# Altium PCB BF6底板.PcbDoc
Units mm, origin at the board's own origin, x right, y up, seen from the top; angles counter-clockwise.
Board outline 400 x 300 mm, 2 copper layers (Top Layer, Bottom Layer); 84 components, 64 nets, 657 pads, 0 vias.
Unrouted connection lines stored in the file: 176.
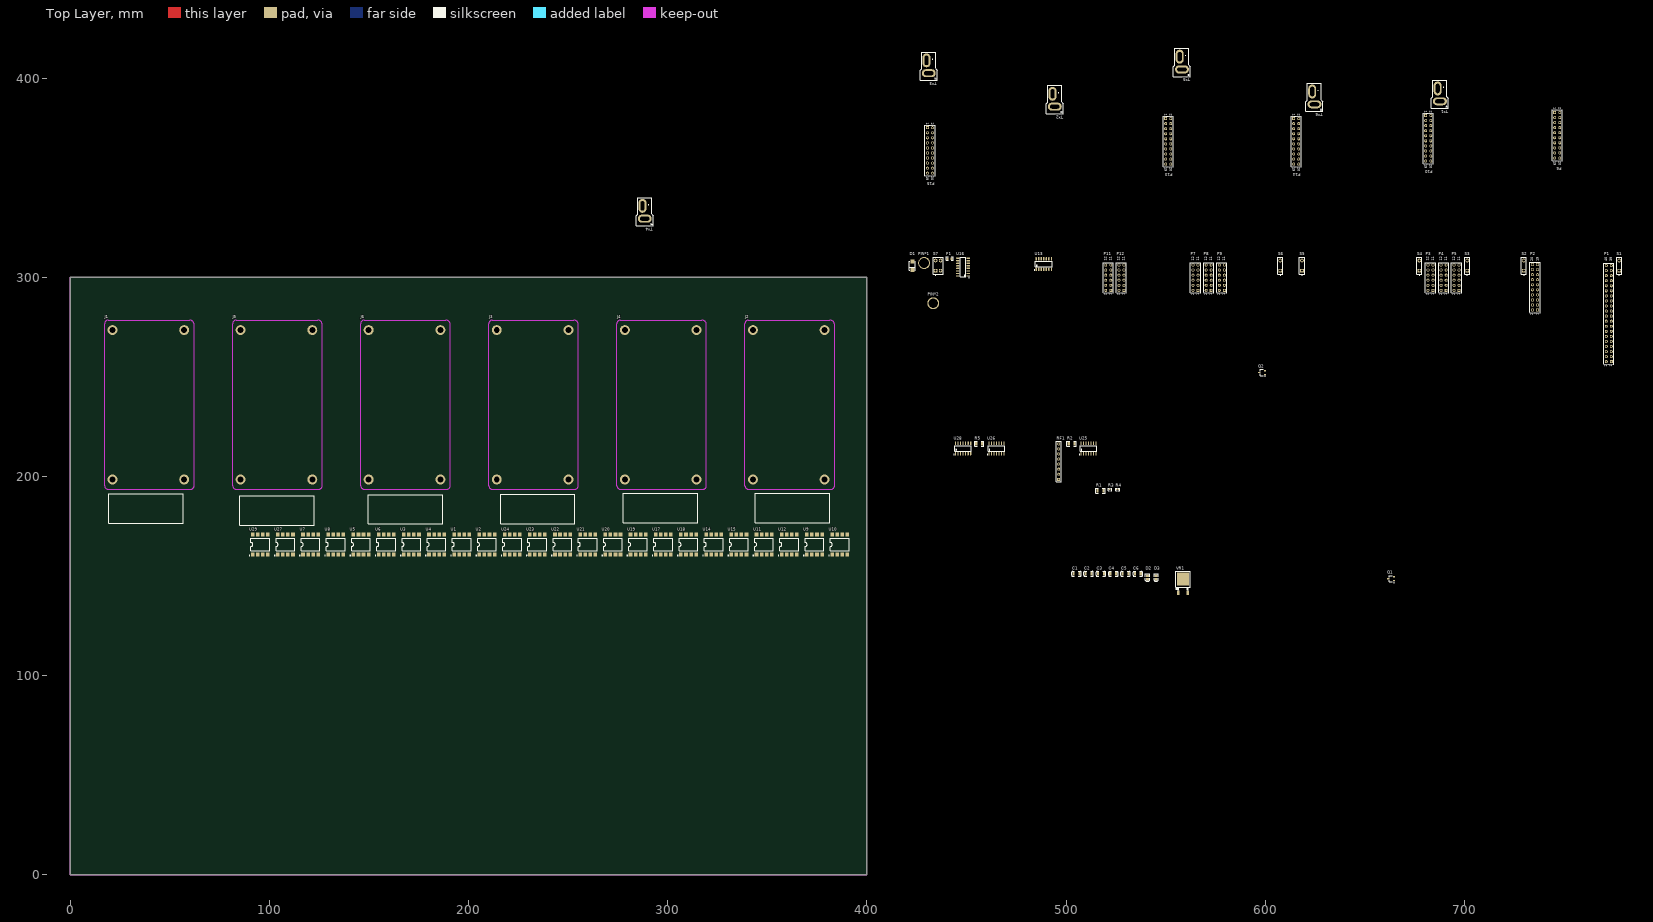
[diagram p0: Top Layer view]
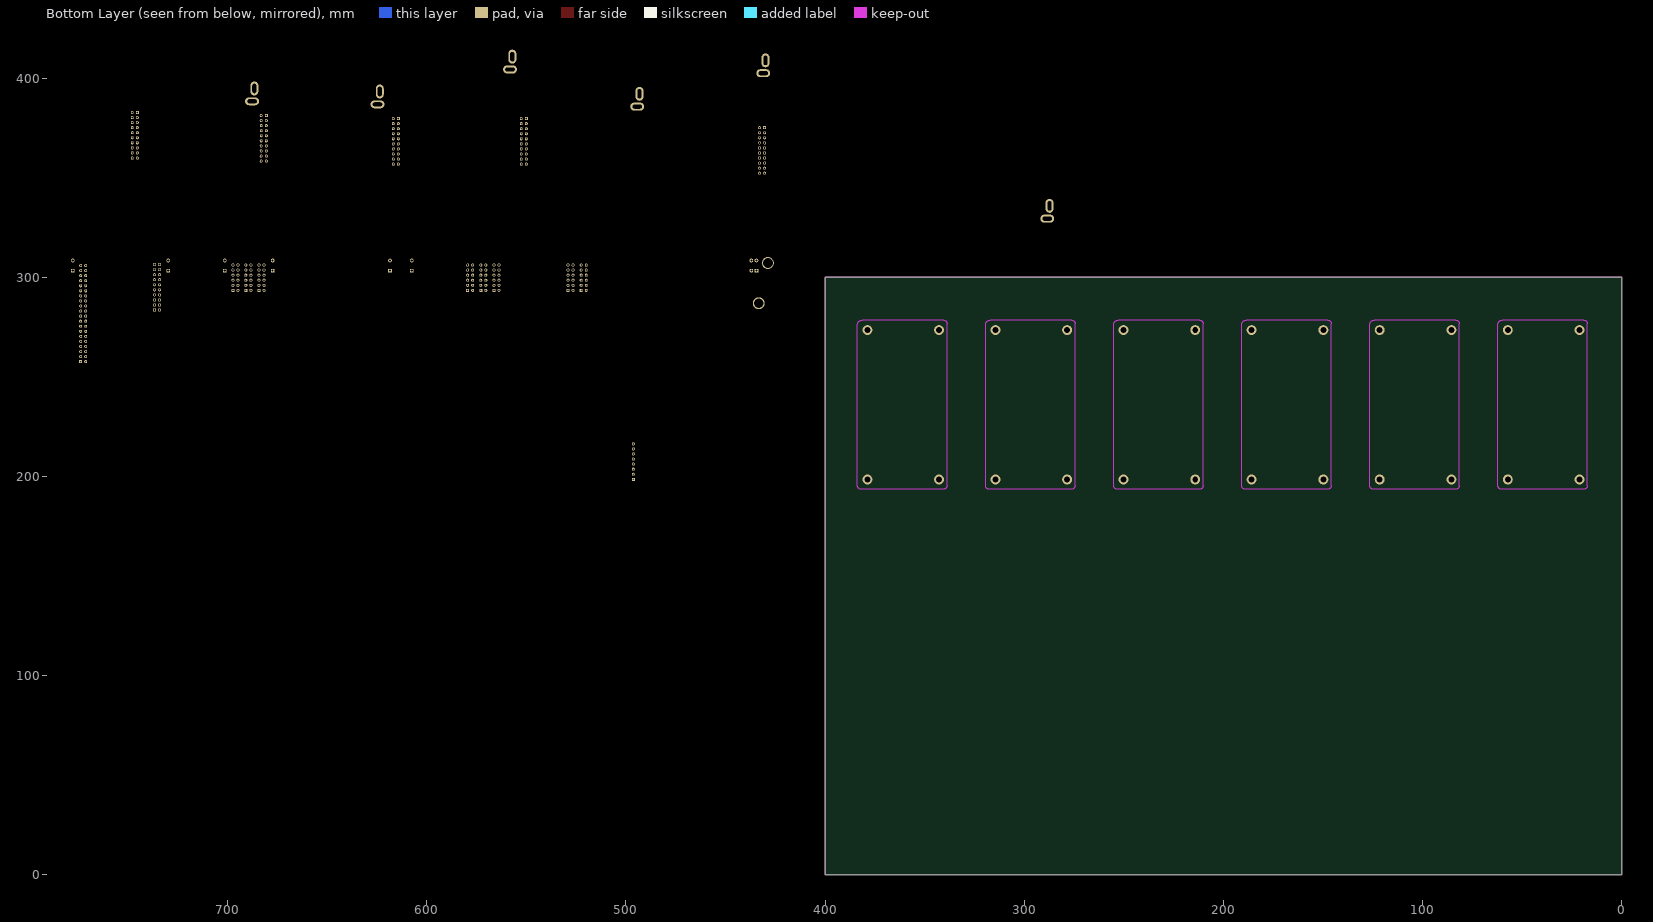
[diagram p1: Bottom Layer view, seen from below]

## Layer stack, top to bottom
Top Solder: solder mask 0.0102, Solder Resist, Dk 3.5
Top Layer: signal copper 0.0356
Dielectric 1: dielectric 0.32, FR-4, Dk 4.8
Bottom Layer: signal copper 0.0356
Bottom Solder: solder mask 0.0102, Solder Resist, Dk 3.5

## Board outline
0,0 0,300 400,300 400,0

## Design rules (kind name [scope] priority, off if disabled: settings)
Clearance [All] p1: gap=0.254 ignorepadtopadclearanceinfootprint=FALSE except(0: Arc-Hole Track-Hole SMDPad-Hole THPad-Hole Via-Hole Fill-Hole Poly-Hole Region-Hole Text-Hole)
PolygonConnect [All] p1: connectstyle=Relief reliefconductorwidth=0.254 reliefentries=4 polygonreliefangle="90 Angle" airgapwidth=0.254
RoutingVias [All] p1: holewidth=0.711 width=1.27 viastyle="Through Hole" minholewidth=0.711 minwidth=1.27 maxholewidth=0.711 maxwidth=1.27
SolderMaskExpansion [All] p1: expansion=0.102
Width [All] p1: maxlimit=0.254 minlimit=0.254 preferedwidth=0.254
30 further rules are at their usual default settings.

## Components (designator, comment, footprint, x,y, rotation, side; value= is the part's Value field where it differs from the comment)
C1 "10nF (103) 10% 50V" 1206_C 505.206,151.13 r0 top
C2 "10uF (106) 10% 50V" 1206_C 511.302,151.13 r0 top
C3 "4.7uF (475) 10% 50V" 1206_C 517.525,151.13 r0 top
C4 "10uF (106) 10% 50V" 1206_C 523.748,151.13 r0 top
C5 "10uF (106) 10% 50V" 1206_C 529.844,151.13 r0 top
C6 "10nF (103) 10% 50V" 1206_C 536.067,151.13 r0 top
D1 "M7" SMA(DO-214AC)_S1 422.783,305.816 r90 top
D2 "翠绿 0805" 0805_LED_S1 540.893,149.352 r90 top
D3 "白灯 0805" 0805_LED_S1 545.211,149.352 r90 top
F1 "10A" 0805(2012) 441.579,309.372 r0 top
J1 "Socket" PCBComponent_1 40.894,236.982 r90 top
J2 "Socket" PCBComponent_1 362.458,236.982 r90 top
J3 "Socket" PCBComponent_1 233.832,236.982 r90 top
J4 "Socket" PCBComponent_1 298.145,236.982 r90 top
J5 "Socket" PCBComponent_1 105.207,236.982 r90 top
J6 "Socket" PCBComponent_1 169.52,236.982 r90 top
P1 "Header 20X2" HDR2X20 773.811,257.683 r90 top
P2 "Header 10X2" HDR2X10 736.727,283.591 r90 top
P3 "Header 6X2" HDR2X6 684.276,293.497 r90 top
P4 "Header 6X2" HDR2X6 690.88,293.497 r90 top
P5 "Header 6X2" HDR2X6 697.357,293.497 r90 top
P6 "Header 10X2" HDR2X10 745.363,382.791 r270 top
P7 "Header 6X2" HDR2X6 566.293,293.497 r90 top
P8 "Header 6X2" HDR2X6 572.897,293.497 r90 top
P9 "Header 6X2" HDR2X6 579.501,293.497 r90 top
P10 "Header 10X2" HDR2X10 680.593,381.254 r270 top
P11 "Header 6X2" HDR2X6 522.478,293.497 r90 top
P12 "Header 6X2" HDR2X6 529.082,293.497 r90 top
P13 "Header 10X2" HDR2X10 550.037,379.73 r270 top
P14 "Header 10X2" HDR2X10 614.299,379.73 r270 top
P15 "Header 10X2" HDR2X10 430.403,375.158 r270 top
PIN*1 "PIN" PIN 428.752,307.213 r0 top
PIN*2 "PIN" PIN 433.324,287.02 r0 top
Q1 "AO3400A N道沟 X0YV1T SOT-23" SOT-23-3L 663.194,148.717 r0 top
Q2 "AO3400A N道沟 X0YV1T SOT-23" SOT-23-3L 598.424,252.222 r0 top
R1 "100Ω (1000) ±1%" 1206_R 517.271,192.913 r0 top
R2 "100Ω (1000) ±1%" 1206_R 502.793,216.408 r0 top
R3 "1KΩ (1001) ±1%" 0402_R 522.097,193.548 r0 top
R4 "1KΩ (1001) ±1%" 0402_R 525.907,193.548 r0 top
R5 "100Ω (1000) ±1%" 1206_R 456.438,216.408 r0 top
RF1 "Header 8" HDR1X8 496.316,198.628 r90 top
S1 "SW-SPST" SPST-2 777.748,305.943 r90 top
S2 "SW-SPST" SPST-2 729.869,305.943 r90 top
S3 "SW-SPST" SPST-2 701.421,305.943 r90 top
S4 "SW-SPST" SPST-2 677.418,305.943 r90 top
S5 "SW-SPST" SPST-2 618.49,305.943 r90 top
S6 "SW-SPST" SPST-2 607.568,305.943 r90 top
S7 "SW-DPST" DPST-4 435.737,305.943 r90 top
T*1 "T头" T插 687.324,393.586 r270 top
T*2 "T头" T插 493.938,390.906 r270 top
T*3 "T头" T插 430.657,407.67 r270 top
T*4 "T头" T插 288.036,334.645 r270 top
T*5 "T头" T插 557.784,409.575 r270 top
T*6 "T头" T插 624.332,392.049 r270 top
U1 "6N137S(TA)" SMD-8_6.3mm 196.579,165.862 r0 top
U2 "6N137S(TA)" SMD-8_6.3mm 209.23,165.862 r0 top
U3 "6N137S(TA)" SMD-8_6.3mm 171.279,165.862 r0 top
U4 "6N137S(TA)" SMD-8_6.3mm 183.929,165.862 r0 top
U5 "6N137S(TA)" SMD-8_6.3mm 145.978,165.862 r0 top
U6 "6N137S(TA)" SMD-8_6.3mm 158.629,165.862 r0 top
U7 "6N137S(TA)" SMD-8_6.3mm 120.678,165.862 r0 top
U8 "6N137S(TA)" SMD-8_6.3mm 133.328,165.862 r0 top
U9 "6N137S(TA)" SMD-8_6.3mm 373.684,165.862 r0 top
U10 "6N137S(TA)" SMD-8_6.3mm 386.334,165.862 r0 top
U11 "6N137S(TA)" SMD-8_6.3mm 348.383,165.862 r0 top
U12 "6N137S(TA)" SMD-8_6.3mm 361.033,165.862 r0 top
U13 "74HC04D" SOIC-14_150mil 488.823,306.705 r0 top
U14 "6N137S(TA)" SMD-8_6.3mm 323.082,165.862 r0 top
U15 "6N137S(TA)" SMD-8_6.3mm 335.733,165.862 r0 top
U16 "74HC138D" SOIC-16_150mil 448.31,305.181 r90 top
U17 "6N137S(TA)" SMD-8_6.3mm 297.782,165.862 r0 top
U18 "6N137S(TA)" SMD-8_6.3mm 310.432,165.862 r0 top
U19 "6N137S(TA)" SMD-8_6.3mm 285.132,165.862 r0 top
U20 "6N137S(TA)" SMD-8_6.3mm 272.481,165.862 r0 top
U21 "6N137S(TA)" SMD-8_6.3mm 259.831,165.862 r0 top
U22 "6N137S(TA)" SMD-8_6.3mm 247.181,165.862 r0 top
U23 "6N137S(TA)" SMD-8_6.3mm 234.53,165.862 r0 top
U24 "6N137S(TA)" SMD-8_6.3mm 221.88,165.862 r0 top
U25 "74HC08D" SOIC-14_150mil 511.302,214.122 r0 top
U26 "74HC08D" SOIC-14_150mil 465.074,214.122 r0 top
U27 "6N137S(TA)" SMD-8_6.3mm 108.027,165.862 r0 top
U28 "74HC08D" SOIC-14_150mil 448.31,214.122 r0 top
U29 "6N137S(TA)" SMD-8_6.3mm 95.377,165.862 r0 top
VR1 "L78M05ABDT-TR" TO-252-2-180 558.673,141.605 r90 top

## Footprints (in the part's own frame and the unit in brackets; to place one, negate y for a bottom-side part, rotate by r counter-clockwise, add the part's x,y. Pads: shape width x height; smd on the part's side, far side on the other; paste and mask are expansions set on the pad)
0402_R [mm]
  rect 0.6x0.65 smd mask+0.051: 1(-0.425,0) 2(0.425,0)
  silkscreen extent -0.97,-0.58 0.97,0.58, body extent -0.57,-0.27 0.58,0.28, height 0.41
0805(2012) [mil]
  rect 40x50 smd: 1(-40,0) 2(40,0)
  silkscreen extent -70,-35 70,35
0805_LED_S1 [mm]
  rect 1.16x1.47 smd: A(0.89,0) K(-0.89,0)
  silkscreen extent -2.24,-1.04 1.77,1.03, body extent -1.01,-0.62 1.01,0.62, height 1.1
1206_C [mm]
  rect 1.13x1.8 smd: 1(-1.49,0) 2(1.49,0)
  silkscreen extent -2.36,-1.2 2.35,1.2, body extent -1.6,-0.81 1.6,0.79, height 1
1206_R [mm]
  rect 1.13x1.8 smd: 1(-1.49,0) 2(1.49,0)
  silkscreen extent -2.36,-1.2 2.35,1.2, body extent -1.7,-0.86 1.65,0.87, height 0.85
DPST-4 [mm] "Switch; 4 Leads"
  rect 1.85x1.85 hole 1.1: 1(-2.54,1.27)
  round 1.85 hole 1.1: 2(-2.54,-1.27) 3(2.54,-1.27) 4(2.54,1.27)
  silkscreen extent -4.88,-2.54 4.28,2.54
HDR1X8 [mm] "Connector; Header; 8 Position"
  rect 1.5x1.5 hole 0.9: 1(0,0)
  round 1.5 hole 0.9: 2(2.54,0) 3(5.08,0) 4(7.62,0) 5(10.16,0) 6(12.7,0) 7(15.24,0) 8(17.78,0)
  silkscreen extent -1.27,-1.27 19.05,1.27, body extent -1.27,-1.27 19.05,1.27, height 7.58
HDR2X6 [mm] "Connector; Header; 6x2 Position"
  rect 1.5x1.5 hole 0.9: 1(0,0)
  round 1.5 hole 0.9: 2(0,2.54) 3(2.54,0) 4(2.54,2.54) 5(5.08,0) 6(5.08,2.54) 7(7.62,0) 8(7.62,2.54) 9(10.16,0) 10(10.16,2.54) 11(12.7,0) 12(12.7,2.54)
  silkscreen extent -1.27,-1.27 13.97,3.81, body extent -1.27,-1.27 13.97,3.81, height 7.58
HDR2X10 [mm] "Connector; Header; 10x2 Position"
  rect 1.5x1.5 hole 0.9: 1(0,0)
  round 1.5 hole 0.9: 2(0,2.54) 3(2.54,0) 4(2.54,2.54) 5(5.08,0) 6(5.08,2.54) 7(7.62,0) 8(7.62,2.54) 9(10.16,0) 10(10.16,2.54) 11(12.7,0) 12(12.7,2.54) 13(15.24,0) 14(15.24,2.54) 15(17.78,0) 16(17.78,2.54) 17(20.32,0) 18(20.32,2.54) 19(22.86,0) 20(22.86,2.54)
  silkscreen extent -1.27,-1.27 24.13,3.81, body extent -1.27,-1.27 24.13,3.81, height 7.58
HDR2X20 [mm] "Connector; Header; 20x2 Position"
  rect 1.5x1.5 hole 0.9: 1(0,0)
  round 1.5 hole 0.9: 2(0,2.54) 3(2.54,0) 4(2.54,2.54) 5(5.08,0) 6(5.08,2.54) 7(7.62,0) 8(7.62,2.54) 9(10.16,0) 10(10.16,2.54) 11(12.7,0) 12(12.7,2.54) 13(15.24,0) 14(15.24,2.54) 15(17.78,0) 16(17.78,2.54) 17(20.32,0) 18(20.32,2.54) 19(22.86,0) 20(22.86,2.54) 21(25.4,0) 22(25.4,2.54) 23(27.94,0) 24(27.94,2.54) 25(30.48,0) 26(30.48,2.54) 27(33.02,0) 28(33.02,2.54) 29(35.56,0) 30(35.56,2.54) 31(38.1,0) 32(38.1,2.54) 33(40.64,0) 34(40.64,2.54) 35(43.18,0) 36(43.18,2.54) 37(45.72,0) 38(45.72,2.54) 39(48.26,0) 40(48.26,2.54)
  silkscreen extent -1.27,-1.27 49.53,3.81, body extent -1.27,-1.27 49.53,3.81, height 7.58
PCBComponent_1 [mm]
  round 5 hole 3: 0(-38.454,-16.312) 0(-38.454,19.688) 0(36.546,-16.312) 0(36.546,19.688)
  oval 4x7 on Mech15: 1(-2.34,14.895)
  round 4 on Mech15: 1(35.841,-5.906) 1(35.841,-0.826) 1(35.841,4.254) 1(35.841,9.334)
  oval 7x4 on Mech15: 2(4.104,16.038)
  Top Layer pour cut-out: -6.196,16.962
  Keep-Out Layer lines w0.254: -41.507,23.688 ccw(c-41.507,21.741) -43.454,21.741 -43.454,-19.407 ccw(c-41.549,-19.407) -41.549,-21.312 39.223,-21.312 ccw(c39.223,-18.989) 41.546,-18.989 41.546,21.925 ccw(c39.783,21.925) 39.783,23.688 -41.507,23.688
  body extent -40.81,-19.61 22.79,21, height 7.58
PIN [mm]
  round 6 hole 5: 1(0,0)
SMA(DO-214AC)_S1 [mm]
  rect 2x2 smd: 1(2.1,0) 2(-2.1,0)
  silkscreen extent -2.35,-1.5 2.35,1.5
SMD-8_6.3mm [mm]
  rect 1.8x2 smd: 1(-3.81,-4.95) 2(-1.27,-4.95) 3(1.27,-4.95) 4(3.81,-4.95) 5(3.81,4.95) 6(1.27,4.95) 7(-1.27,4.95) 8(-3.81,4.95)
  silkscreen extent -5.6,-5.7 4.7,3.1
SOIC-14_150mil [mm]
  oval 0.6x1.8 smd: 1(-3.81,-2.6) 2(-2.54,-2.6) 3(-1.27,-2.6) 4(0,-2.6) 5(1.27,-2.6) 6(2.54,-2.6) 7(3.81,-2.6) 8(3.81,2.6) 9(2.54,2.6) 10(1.27,2.6) 11(0,2.6) 12(-1.27,2.6) 13(-2.54,2.6) 14(-3.81,2.6)
  silkscreen extent -4.75,-3.15 4.2,1.4
SOIC-16_150mil [mm]
  oval 0.6x1.8 smd: 1(-4.445,-2.6) 2(-3.175,-2.6) 3(-1.905,-2.6) 4(-0.635,-2.6) 5(0.635,-2.6) 6(1.905,-2.6) 7(3.175,-2.6) 8(4.445,-2.6) 9(4.445,2.6) 10(3.175,2.6) 11(1.905,2.6) 12(0.635,2.6) 13(-0.635,2.6) 14(-1.905,2.6) 15(-3.175,2.6) 16(-4.445,2.6)
  silkscreen extent -5.4,-3.05 4.97,1.4
SOT-23-3L [mm] "http://www.aosmd.com/res/packaging_information/SOT-23-3L.pdf"
  rect 1.15x0.65 smd: 1(1.475,-0.95) 2(1.475,0.95) 3(-1.475,0)
  silkscreen extent -0.9,-1.95 1.6,1.55, body extent -0.9,-1.55 0.9,1.55, height 1.25
SPST-2 [mm] "Switch; 2 Leads"
  rect 1.85x1.85 hole 1.1: 1(-2.54,0)
  round 1.85 hole 1.1: 2(2.54,0)
  silkscreen extent -4.89,-1.27 4.28,1.27
TO-252-2-180 [mm] "180度编带包装"
  rect 2.2x1.2 smd: 1(0,2.361) 3(0.004,-2.361)
  rect 6.5x6 smd: 2(7,0)
  silkscreen extent 1.5,-3.57 10.75,3.57, body extent -0.2,-3.27 9.74,3.27, height 2.44
T插 [mm]
  oval 4x7 hole 1.9 slot 4.6 at 90 deg: 1(5.161,0.416)
  oval 7x4 hole 1.9 slot 4.6 at 0 deg: 2(-1.283,-0.727)
  silkscreen extent -5.46,-3.9 8.75,4.61

## Part data
C1 C6: library part "1206 10nF (103) 10% 50V", "贴片电容", Package=1206, SuppliersPartNumber=C1846, ComponentLink1Description=供应商, ComponentLink1URL=http://www.szlcsc.com/product/details_2198.html, Supplier=LC
C2 C4 C5: library part "1206 10uF (106) 10% 50V", "贴片电容", Package=1206, SuppliersPartNumber=C13585, ComponentLink1Description=供应商, ComponentLink1URL=http://www.szlcsc.com/product/details_14236.html, Supplier=LC
C3: library part "1206 4.7uF (475) 10% 50V", "贴片电容", Package=1206, SuppliersPartNumber=C29823, ComponentLink1Description=供应商, ComponentLink1URL=http://www.szlcsc.com/product/details_30577.html, Supplier=LC
D1: library part "SMA(DO-214AC) M7", "二极管", Package=SMA(DO-214AC), SuppliersPartNumber=C95872, ComponentLink1Description=供应商, ComponentLink1URL=http://www.szlcsc.com/product/details_2841.html, Supplier=LC, 备注="1N4007 4007 编号C2464 已经停售, 使用新"
D2: library part "0805 翠绿", "发光二极管", Package=0805, SuppliersPartNumber=C2297, ComponentLink1Description=供应商, ComponentLink1URL=http://www.szlcsc.com/product/details_2670.html, Supplier=LC
D3: library part "0805 白灯", "发光二极管", Package=0805, SuppliersPartNumber=C34499, ComponentLink1Description=供应商, ComponentLink1URL=http://www.szlcsc.com/product/details_35468.html, Supplier=LC
F1: library part "Fuse 1", "Fuse", LatestRevisionDate=17-Jul-2002, LatestRevisionNote="Re-released for DXP Platform.", PackageReference=PIN-W2/E2.8, Published=8-Jun-2000, Publisher="Altium Limited"
P1: "Header, 20-Pin, Dual row", LatestRevisionDate=17-Jul-2002, LatestRevisionNote="Re-released for DXP Platform.", Publisher="Altium Limited"
P2 P6 P10 P13 P14 P15: "Header, 10-Pin, Dual row", LatestRevisionDate=17-Jul-2002, LatestRevisionNote="Re-released for DXP Platform.", Publisher="Altium Limited"
P3 P4 P5 P7 P8 P9 P11 P12: "Header, 6-Pin, Dual row", LatestRevisionDate=17-Jul-2002, LatestRevisionNote="Re-released for DXP Platform.", Publisher="Altium Limited"
Q1 Q2: "MOS(场效应管)", Package=SOT-23, SuppliersPartNumber=C20917, ComponentLink1Description=供应商, ComponentLink1URL=http://www.szlcsc.com/product/details_21629.html, Supplier=LC
R1 R2 R5: library part "1206 100Ω (1000) 1%", "贴片电阻", Package=1206, SuppliersPartNumber=C17901, ComponentLink1Description=供应商, ComponentLink1URL=http://www.szlcsc.com/product/details_18589.html, Supplier=LC
R3 R4: library part "0402 1KΩ (1001) 1%", "贴片电阻", Package=0402, SuppliersPartNumber=C11702, ComponentLink1Description=供应商, ComponentLink1URL=http://www.szlcsc.com/product/details_12256.html, Supplier=LC
RF1: "Header, 8-Pin", LatestRevisionDate=17-Jul-2002, LatestRevisionNote="Re-released for DXP Platform.", Publisher="Altium Limited"
S1 S2 S3 S4 S5 S6: "Single-Pole, Single-Throw Switch", LatestRevisionDate=17-Jul-2002, LatestRevisionNote="Re-released for DXP Platform.", PackageDescription="Switch; 2 Leads", PackageReference=SPST-2, Published=24-Mar-1999, Publisher="Altium Limited"
S7: "Double-Pole, Single-Throw Switch", LatestRevisionDate=17-Jul-2002, LatestRevisionNote="Re-released for DXP Platform.", PackageDescription="Switch; 4 Leads", PackageReference=DPST-4, Published=24-Mar-1999, Publisher="Altium Limited"
T*1 T*2 T*3 T*4 T*5 T*6: library part Tͷ
U1 U2 U3 U4 U5 U6 U7 U8 U9 U10 U11 U12 U14 U15 U17 U18 U19 U20 U21 U22 U23 U24 U27 U29: library part 6N137S(TA)_[C16496], "贴片光耦", Package=SMD-8_6.3mm, SuppliersPartNumber=C16496, ComponentLink1Description=供应商, ComponentLink1URL=http://www.szlcsc.com/product/details_17178.html, Supplier=LC
U13: library part 74HC04D_[C5590], "74系列逻辑芯片", Package=SOIC-14_150mil, SuppliersPartNumber=C5590, ComponentLink1Description=供应商, ComponentLink1URL=http://www.szlcsc.com/product/details_6041.html, Supplier=LC
U16: library part 74HC138D_[C5602], "74系列逻辑芯片", Package=SOIC-16_150mil, SuppliersPartNumber=C5602, ComponentLink1Description=供应商, ComponentLink1URL=http://www.szlcsc.com/product/details_6053.html, Supplier=LC
U25 U26 U28: library part 74HC08D_[C5593], "74系列逻辑芯片", Package=SOIC-14_150mil, SuppliersPartNumber=C5593, ComponentLink1Description=供应商, ComponentLink1URL=http://www.szlcsc.com/product/details_6044.html, Supplier=LC
VR1: library part "TO-252-2 L78M05ABDT-TR", "低压差线性稳压(LDO)", Package=TO-252-2, SuppliersPartNumber=C58069, ComponentLink1Description=供应商, ComponentLink1URL=http://www.szlcsc.com/product/details_59107.html, Supplier=LC
J1 J2 J3 J4 J5 J6: LatestRevisionDate=17-Jul-2002, LatestRevisionNote="Re-released for DXP Platform.", Publisher="Altium Limited"

## Nets (pads, with @x,y where several pads share a name; then routed paths per layer and width w, separated by ;. In a path a pad name is that pad's centre, name@x,y a point inside that pad or via, vN(x,y) a via of type N, cw(c..) or ccw(c..) an arc to the next point about the centre after c; other vN are vias at no path point)
+5: C3.2 C4.2 C5.2 C6.2 R3.1 R4.1 U16.6 U16.16 VR1.3
DIR0: P2.8 U2.6
DIR1: P6.8 U4.6
DIR2: P10.8 U6.6
DIR3: P13.8 U8.6
DIR4: P14.8 U10.6
DIR5: P15.8 U12.6
EGND: C1.1 C2.1 C3.1 C4.1 C5.1 C6.1 P2.1 P2.2 P2.5 P2.6 P2.9 P2.10 P2.15 P2.16 P2.19 P2.20 P6.1 P6.2 P6.5 P6.6 P6.9 P6.10 P6.15 P6.16 P6.19 P6.20 P10.1 P10.2 P10.5 P10.6 P10.9 P10.10 P10.15 P10.16 P10.19 P10.20 P13.1 P13.2 P13.5 P13.6 P13.9 P13.10 P13.15 P13.16 P13.19 P13.20 P14.1 P14.2 P14.5 P14.6 P14.9 P14.10 P14.15 P14.16 P14.19 P14.20 P15.1 P15.2 P15.5 P15.6 P15.9 P15.10 P15.15 P15.16 P15.19 P15.20 PIN*2.1 T*1.2 T*2.2 T*3.2 T*4.2 T*5.2 T*6.2 U16.4 U16.5 U16.8 VR1.2
FAULTn: U26.3
FAULTn0: P2.17 U25.1
FAULTn1: P6.17 U25.2
FAULTn2: P10.17 U25.4
FAULTn3: P13.17 U25.5
FAULTn4: P14.17 U25.9
FAULTn5: P15.17 U25.10
HC38A: U16.1 U20.6
HC38B: U16.2 U22.6
HC38C: U16.3 U24.6
NetD2_A: D2.A R3.2
NetD2_K: D2.K U16.7
NetD3_A: D3.A R4.2
NetD3_K: D3.K U16.9
NetR1_1: R1.1 U19.2
NetR2_1: R2.1 U21.2
NetR5_1: R5.1 U23.2
NetU13_1: U13.1 U16.15
NetU13_3: U13.3 U16.14
NetU13_5: U13.5 U16.13
NetU13_9: U13.9 U16.12
NetU13_11: U13.11 U16.11
NetU13_13: U13.13 U16.10
NetU25_3: U25.3 U25.12
NetU25_6: U25.6 U25.13
NetU25_8: U25.8 U26.2
NetU25_11: U25.11 U26.1
NetU26_6: U26.6 U26.13
NetU26_11: U26.11 U28.4
NetU26_12: U26.12 U28.3
NetU28_5: U28.5 U28.8
RESET: P2.4 P6.4 P10.4 P13.4 P14.4 P15.4 U15.6
SCLK: P2.11 P6.11 P10.11 P13.11 P14.11 P15.11 U17.6
SCS0: U13.2
SCS1: P2.13 P6.13 U13.4
SCS2: P10.13 U13.6
SCS3: P13.13 U13.8
SCS4: P14.13 U13.10
SCS5: P15.13 U13.12
SDATI: P2.12 P6.12 P10.12 P13.12 P14.12 P15.12 U18.6
SDATO: P2.14 P6.14 P10.14 P13.14 P14.14 P15.14
SLEEPn: P2.3 P6.3 P10.3 P13.3 P14.3 P15.3 U14.6
STALLn: U28.6
STALLn0: P2.18 U28.1
STALLn1: P6.18 U28.2
STALLn2: P10.18 U26.4
STALLn3: P13.18 U26.5
STALLn4: P14.18 U28.9
STALLn5: P15.18 U28.10
STEP0: P2.7 U1.6
STEP1: P6.7 U3.6
STEP2: P10.7 U5.6
STEP3: P13.7 U7.6
STEP4: P14.7 U9.6
STEP5: P15.7 U11.6
VCC: C1.2 C2.2 PIN*1.1 T*1.1 T*2.1 T*3.1 T*4.1 T*5.1 T*6.1 VR1.1
pads on no net: D1.1 D1.2 F1.1 F1.2 J1.0 J1.1 J1.2 J2.0 J2.1 J2.2 J3.0 J3.1 J3.2 J4.0 J4.1 J4.2 J5.0 J5.1 J5.2 J6.0 J6.1 J6.2 P1.1 P1.2 P1.3 P1.4 P1.5 P1.6 P1.7 P1.8 P1.9 P1.10 P1.11 P1.12 P1.13 P1.14 P1.15 P1.16 P1.17 P1.18 P1.19 P1.20 P1.21 P1.22 P1.23 P1.24 P1.25 P1.26 P1.27 P1.28 P1.29 P1.30 P1.31 P1.32 P1.33 P1.34 P1.35 P1.36 P1.37 P1.38 P1.39 P1.40 P3.1 P3.2 P3.3 P3.4 P3.5 P3.6 P3.7 P3.8 P3.9 P3.10 P3.11 P3.12 P4.1 P4.2 P4.3 P4.4 P4.5 P4.6 P4.7 P4.8 P4.9 P4.10 P4.11 P4.12 P5.1 P5.2 P5.3 P5.4 P5.5 P5.6 P5.7 P5.8 P5.9 P5.10 P5.11 P5.12 P7.1 P7.2 P7.3 P7.4 P7.5 P7.6 P7.7 P7.8 P7.9 P7.10 P7.11 P7.12 P8.1 P8.2 P8.3 P8.4 P8.5 P8.6 P8.7 P8.8 P8.9 P8.10 P8.11 P8.12 P9.1 P9.2 P9.3 P9.4 P9.5 P9.6 P9.7 P9.8 P9.9 P9.10 P9.11 P9.12 P11.1 P11.2 P11.3 P11.4 P11.5 P11.6 P11.7 P11.8 P11.9 P11.10 P11.11 P11.12 P12.1 P12.2 P12.3 P12.4 P12.5 P12.6 P12.7 P12.8 P12.9 P12.10 P12.11 P12.12 Q1.1 Q1.2 Q1.3 Q2.1 Q2.2 Q2.3 R1.2 R2.2 R5.2 RF1.1 RF1.2 RF1.3 RF1.4 RF1.5 RF1.6 RF1.7 RF1.8 S1.1 S1.2 S2.1 S2.2 S3.1 S3.2 S4.1 S4.2 S5.1 S5.2 S6.1 S6.2 S7.1 S7.2 S7.3 S7.4 U1.1 U1.2 U1.3 U1.4 U1.5 U1.7 U1.8 U2.1 U2.2 U2.3 U2.4 U2.5 U2.7 U2.8 U3.1 U3.2 U3.3 U3.4 U3.5 U3.7 U3.8 U4.1 U4.2 U4.3 U4.4 U4.5 U4.7 U4.8 U5.1 U5.2 U5.3 U5.4 U5.5 U5.7 U5.8 U6.1 U6.2 U6.3 U6.4 U6.5 U6.7 U6.8 U7.1 U7.2 U7.3 U7.4 U7.5 U7.7 U7.8 U8.1 U8.2 U8.3 U8.4 U8.5 U8.7 U8.8 U9.1 U9.2 U9.3 U9.4 U9.5 U9.7 U9.8 U10.1 U10.2 U10.3 U10.4 U10.5 U10.7 U10.8 U11.1 U11.2 U11.3 U11.4 U11.5 U11.7 U11.8 U12.1 U12.2 U12.3 U12.4 U12.5 U12.7 U12.8 U13.7 U13.14 U14.1 U14.2 U14.3 U14.4 U14.5 U14.7 U14.8 U15.1 U15.2 U15.3 U15.4 U15.5 U15.7 U15.8 U17.1 U17.2 U17.3 U17.4 U17.5 U17.7 U17.8 U18.1 U18.2 U18.3 U18.4 U18.5 U18.7 U18.8 U19.1 U19.3 U19.4 U19.5 U19.6 U19.7 U19.8 U20.1 U20.2 U20.3 U20.4 U20.5 U20.7 U20.8 U21.1 U21.3 U21.4 U21.5 U21.6 U21.7 U21.8 U22.1 U22.2 U22.3 U22.4 U22.5 U22.7 U22.8 U23.1 U23.3 U23.4 U23.5 U23.6 U23.7 U23.8 U24.1 U24.2 U24.3 U24.4 U24.5 U24.7 U24.8 U25.7 U25.14 U26.7 U26.8 U26.9 U26.10 U26.14 U27.1 U27.2 U27.3 U27.4 U27.5 U27.6 U27.7 U27.8 U28.7 U28.11 U28.12 U28.13 U28.14 U29.1 U29.2 U29.3 U29.4 U29.5 U29.6 U29.7 U29.8

## Keep-outs
Keep-Out Layer:
  the board outline again, w0.254

## Silkscreen, mask and mechanical layers (free items; w line width, h text height)
Top Overlay:
  lines w0.254: 19.304,176.657 56.642,176.657 56.642,191.262 19.304,191.262 19.304,176.657 ; 85.09,175.641 85.09,190.246 122.428,190.246 122.428,175.641 85.09,175.641 ; 149.733,176.276 149.733,190.881 187.071,190.881 187.071,176.276 149.733,176.276 ; 216.027,176.403 216.027,191.008 253.365,191.008 253.365,176.403 216.027,176.403 ; 277.622,176.911 277.622,191.516 314.96,191.516 314.96,176.911 277.622,176.911 ; 343.916,176.911 343.916,191.516 381.254,191.516 381.254,176.911 343.916,176.911

## Text inside footprints (layer, text, board x,y; h text height)
P1: Top Overlay "1" at 774.319,255.143 h1.27 r90; Top Overlay "2" at 771.779,255.143 h1.27 r90; Top Overlay "40" at 771.779,307.975 h1.27 r90; Top Overlay "39" at 774.319,307.975 h1.27 r90
P2: Top Overlay "20" at 734.695,307.975 h1.27 r90; Top Overlay "19" at 737.235,307.975 h1.27 r90; Top Overlay "1" at 737.235,281.051 h1.27 r90; Top Overlay "2" at 734.695,281.051 h1.27 r90
P3: Top Overlay "2" at 682.244,290.957 h1.27 r90; Top Overlay "1" at 684.784,290.957 h1.27 r90; Top Overlay "1" at 684.784,308.229 h1.27 r90; Top Overlay "1" at 684.784,309.245 h1.27 r90; Top Overlay "12" at 682.244,308.229 h1.27 r90
P4: Top Overlay "2" at 688.848,290.957 h1.27 r90; Top Overlay "1" at 691.388,290.957 h1.27 r90; Top Overlay "1" at 691.388,308.229 h1.27 r90; Top Overlay "1" at 691.388,309.245 h1.27 r90; Top Overlay "12" at 688.848,308.229 h1.27 r90
P5: Top Overlay "2" at 695.325,290.957 h1.27 r90; Top Overlay "1" at 697.865,290.957 h1.27 r90; Top Overlay "1" at 697.865,308.229 h1.27 r90; Top Overlay "1" at 697.865,309.245 h1.27 r90; Top Overlay "12" at 695.325,308.229 h1.27 r90
P6: Top Overlay "20" at 747.395,358.407 h1.27 r270; Top Overlay "19" at 744.855,358.407 h1.27 r270; Top Overlay "1" at 744.855,385.331 h1.27 r270; Top Overlay "2" at 747.395,385.331 h1.27 r270
P7: Top Overlay "2" at 564.261,290.957 h1.27 r90; Top Overlay "1" at 566.801,290.957 h1.27 r90; Top Overlay "1" at 566.801,308.229 h1.27 r90; Top Overlay "1" at 566.801,309.245 h1.27 r90; Top Overlay "12" at 564.261,308.229 h1.27 r90
P8: Top Overlay "2" at 570.865,290.957 h1.27 r90; Top Overlay "1" at 573.405,290.957 h1.27 r90; Top Overlay "1" at 573.405,308.229 h1.27 r90; Top Overlay "1" at 573.405,309.245 h1.27 r90; Top Overlay "12" at 570.865,308.229 h1.27 r90
P9: Top Overlay "2" at 577.469,290.957 h1.27 r90; Top Overlay "1" at 580.009,290.957 h1.27 r90; Top Overlay "1" at 580.009,308.229 h1.27 r90; Top Overlay "1" at 580.009,309.245 h1.27 r90; Top Overlay "12" at 577.469,308.229 h1.27 r90
P10: Top Overlay "20" at 682.625,356.87 h1.27 r270; Top Overlay "19" at 680.085,356.87 h1.27 r270; Top Overlay "1" at 680.085,383.794 h1.27 r270; Top Overlay "2" at 682.625,383.794 h1.27 r270
P11: Top Overlay "2" at 520.446,290.957 h1.27 r90; Top Overlay "1" at 522.986,290.957 h1.27 r90; Top Overlay "1" at 522.986,308.229 h1.27 r90; Top Overlay "1" at 522.986,309.245 h1.27 r90; Top Overlay "12" at 520.446,308.229 h1.27 r90
P12: Top Overlay "2" at 527.05,290.957 h1.27 r90; Top Overlay "1" at 529.59,290.957 h1.27 r90; Top Overlay "1" at 529.59,308.229 h1.27 r90; Top Overlay "1" at 529.59,309.245 h1.27 r90; Top Overlay "12" at 527.05,308.229 h1.27 r90
P13: Top Overlay "20" at 552.069,355.346 h1.27 r270; Top Overlay "19" at 549.529,355.346 h1.27 r270; Top Overlay "1" at 549.529,382.27 h1.27 r270; Top Overlay "2" at 552.069,382.27 h1.27 r270
P14: Top Overlay "20" at 616.331,355.346 h1.27 r270; Top Overlay "19" at 613.791,355.346 h1.27 r270; Top Overlay "1" at 613.791,382.27 h1.27 r270; Top Overlay "2" at 616.331,382.27 h1.27 r270
P15: Top Overlay "20" at 432.435,350.774 h1.27 r270; Top Overlay "19" at 429.895,350.774 h1.27 r270; Top Overlay "1" at 429.895,377.698 h1.27 r270; Top Overlay "2" at 432.435,377.698 h1.27 r270